# EAGLE board EJ8 LEDRGB (EAGLE 9.7.0)

Size 131.19 x 104.07 mm. Coordinates in mm from the lower left corner, seen from the top.
Outline: 0,0 131.19,0 131.19,104.07 0,104.07 0,0
Copper layers (1*16): Top 0.035mm / dielectric 1.5mm / Bottom 0.035mm
Design rules "default": minimum track width 6mil, minimum drill 0.35mm, track to track 6mil, track to pad 6mil, pad to pad 6mil, via to via 6mil, smd to smd 6mil, copper to edge 40mil, drill to drill 6mil, minimum pad ring 10mil, minimum via ring 8mil, stop-mask expansion 4mil, vias tented up to drill 0mil, thermal gap 10mil

## Footprints (pad centres in the part's own frame; a part is rotated, then mirrored left to right if it is on the bottom)
LED-RGB-5MM = drill 0.9: B 0.635,0.635; C -0.635,-0.635; G 1.905,-0.635; R -1.905,0.635
RESAD1016W63L850D250B = drill 0.83 pad 1.43: 1 -5.08,0; 2 5.08,0
ARDUINO-UNO-R3-SHIELD = drill 1.016 pad 1.88: 3.3V 24.13,-2.54; 5V 24.13,0; A0 24.13,12.7; A1 24.13,15.24; A2 24.13,17.78; A3 24.13,20.32; A4 24.13,22.86; A5 24.13,25.4; AREF -24.13,-13.97; D2 -24.13,20.32; D3 -24.13,17.78; D4 -24.13,15.24; D5 -24.13,12.7; D6 -24.13,10.16; D7 -24.13,7.62; D8 -24.13,3.81; D9 -24.13,1.27; D10 -24.13,-1.27; D11 -24.13,-3.81; D12 -24.13,-6.35; D13 -24.13,-8.89; GND@0 24.13,2.54; GND@1 24.13,5.08; GND@2 -24.13,-11.43; IOREF 24.13,-7.62; NC 24.13,-10.16; RES 24.13,-5.08; RX -24.13,25.4; SCL -24.13,-19.05; SDA -24.13,-16.51; TX -24.13,22.86; VIN 24.13,7.62

## Placement (x,y rotation side)
D1  LED-RGBRCBG-PTH  [LED-RGB-5MM]  121.05,96.58 0 top
R1  1k  [RESAD1016W63L850D250B]  117.24,88.96 90 top
R2  1k  [RESAD1016W63L850D250B]  122.32,88.96 90 top
R3  1k  [RESAD1016W63L850D250B]  124.86,88.96 90 top
U1  ARDUINO-UNO-R3-SHIELD  [ARDUINO-UNO-R3-SHIELD]  47.88,29.84 270 top

## Library data of the parts
D1 R1-R3 U1 = Tinkercad

## Nets
D1_B: D1.B R2.2
D1_G: D1.G R3.2
D1_R: D1.R R1.2
U1_D7: R3.1 U1.D7
U1_D8: R2.1 U1.D8
U1_D13: R1.1 U1.D13
U1_GND: D1.C U1.GND@0 U1.GND@1 U1.GND@2

## Tracks (layer width: path | path; a pad name or v marks a point on that pad's centre or on a via)
D1_B  (1 unrouted)
D1_G  (1 unrouted)
D1_R  (1 unrouted)
U1_D7  (1 unrouted)
U1_D8  (1 unrouted)
U1_D13  (1 unrouted)
U1_GND  (3 unrouted)